# EAGLE board unoedge_v3_rutado_mcleod (EAGLE 7.2.0)
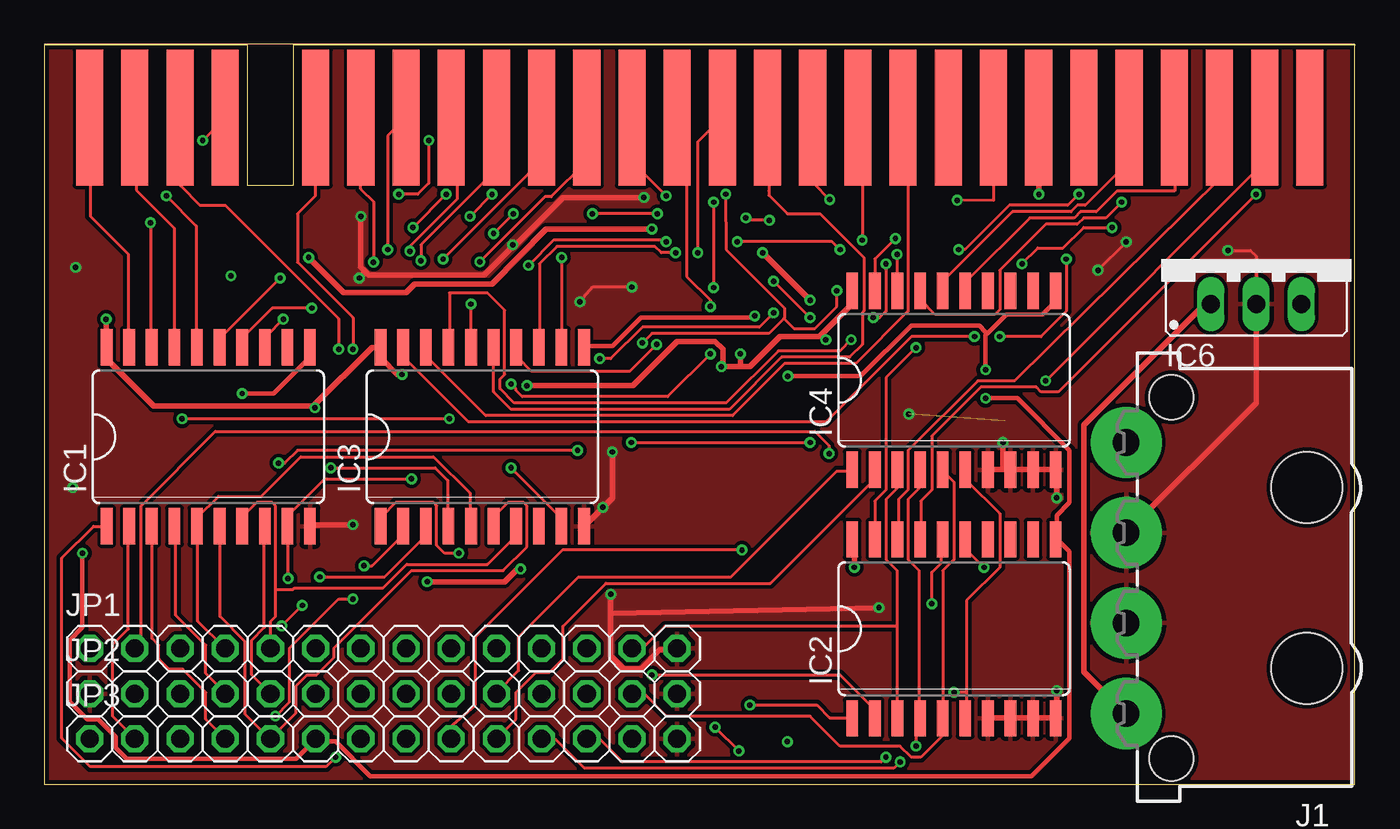
[diagram p0: board, top side]
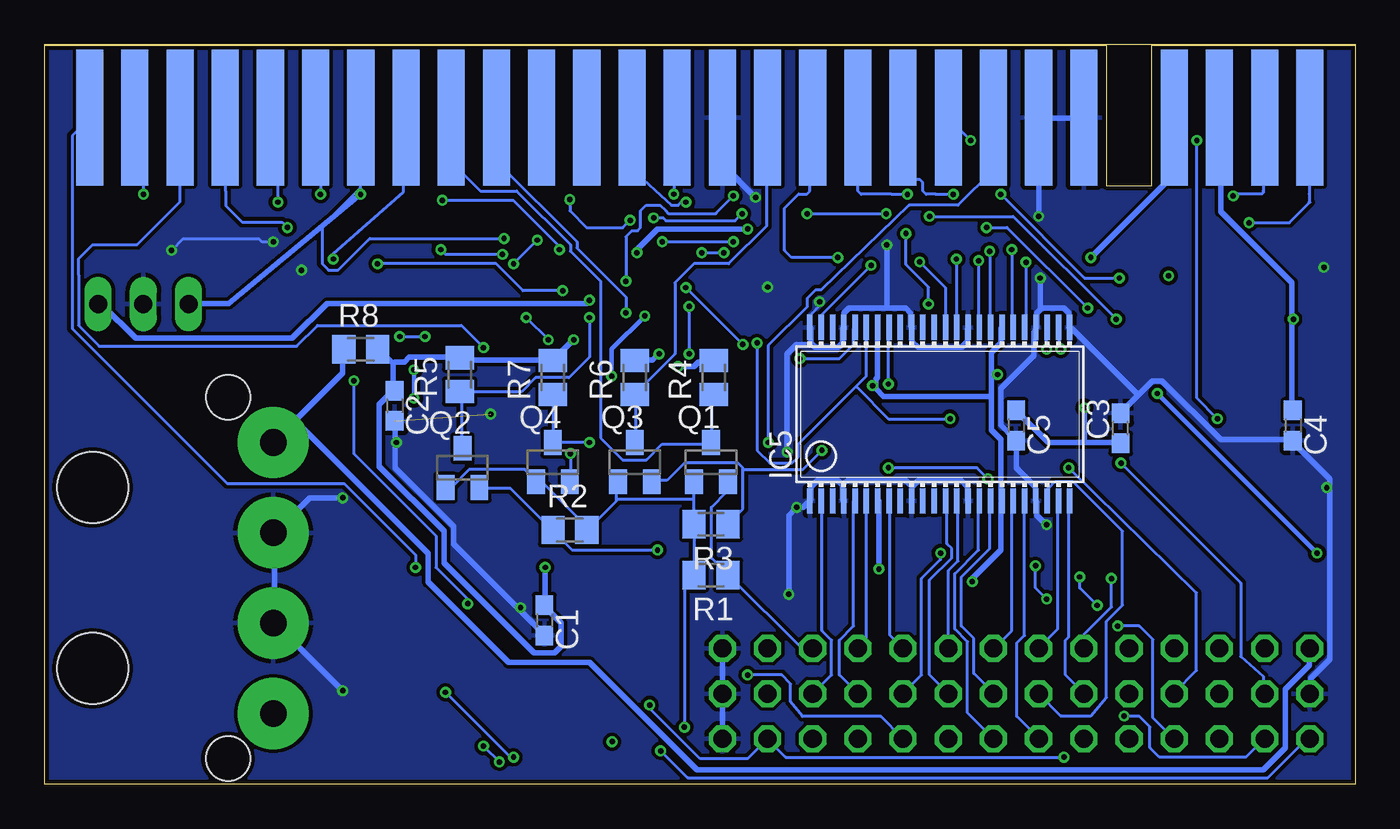
[diagram p1: board, bottom side, seen from below]

Size 73.66 x 41.58 mm. Coordinates in mm from the lower left corner, seen from the top.
Outline: 0,0 73.64,0 73.64,41.58 0,41.58 0,0
Copper layers (1*16): Top 0.035mm / dielectric 1.5mm / Bottom 0.035mm
Design rules "ITEADstudio_DRC": minimum track width 6mil, minimum drill 12mil, track to track 6mil, track to pad 6mil, pad to pad 6mil, via to via 6mil, smd to smd 0mil, copper to edge 10mil, drill to drill 10mil, minimum pad ring 10mil, minimum via ring 6mil, stop-mask expansion 2mil, vias tented up to drill 100mil, thermal gap 10mil
Net classes: 0 default: width 0.178 mm, clearance 0.178 mm; 1 power: width 0.305 mm, clearance 0.203 mm to class 0, clearance 0.203 mm; 2 clk: width 0.254 mm, clearance 0.178 mm to class 0, clearance 0.203 mm to class 1, clearance 0.178 mm

## Footprints (pad centres in the part's own frame; a part is rotated, then mirrored left to right if it is on the bottom)
C0603 = smd 1.1 x 1: 1 -0.85,0; 2 0.85,0
SO20W = smd 0.66 x 2.032: 1 -5.715,-5.029; 2 -4.445,-5.029; 3 -3.175,-5.029; 4 -1.905,-5.029; 5 -0.635,-5.029; 6 0.635,-5.029; 7 1.905,-5.029; 8 3.175,-5.029; 9 4.445,-5.029; 10 5.715,-5.029; 11 5.715,5.029; 12 4.445,5.029; 13 3.175,5.029; 14 1.905,5.029; 15 0.635,5.029; 16 -0.635,5.029; 17 -1.905,5.029; 18 -3.175,5.029; 19 -4.445,5.029; 20 -5.715,5.029
SSOP48DL = smd 0.305 x 1.422: 1 -6.985,-4.877; 2 -6.35,-4.877; 3 -5.715,-4.877; 4 -5.08,-4.877; 5 -4.445,-4.877; 6 -3.81,-4.877; 7 -3.175,-4.877; 8 -2.54,-4.877; 9 -1.905,-4.877; 10 -1.27,-4.877; 11 -0.635,-4.877; 12 0,-4.877; 13 0.635,-4.877; 14 1.27,-4.877; 15 1.905,-4.877; 16 2.54,-4.877; 17 3.175,-4.877; 18 3.81,-4.877; 19 4.445,-4.877; 20 5.08,-4.877; 21 5.715,-4.877; 22 6.35,-4.877; 23 6.985,-4.877; 24 7.62,-4.877; 25 7.62,4.877; 26 6.985,4.877; 27 6.35,4.877; 28 5.715,4.877; 29 5.08,4.877; 30 4.445,4.877; 31 3.81,4.877; 32 3.175,4.877; 33 2.54,4.877; 34 1.905,4.877; 35 1.27,4.877; 36 0.635,4.877; 37 0,4.877; 38 -0.635,4.877; 39 -1.27,4.877; 40 -1.905,4.877; 41 -2.54,4.877; 42 -3.175,4.877; 43 -3.81,4.877; 44 -4.445,4.877; 45 -5.08,4.877; 46 -5.715,4.877; 47 -6.35,4.877; 48 -6.985,4.877
78XXS = drill 1.016 long: GND 0,-2.54; IN -2.54,-2.54; OUT 2.54,-2.54
827001 = drill 1.5 pad 4: 1 -7.62,0; 2 -2.54,0; 3 2.54,0; 4 7.62,0 | hole 4: 5.08,-10.16; -5.08,-10.16 | hole 2.5: 10.16,-2.54; -10.16,-2.54
1X14 = drill 1.016 octagon: 1 -16.51,0; 2 -13.97,0; 3 -11.43,0; 4 -8.89,0; 5 -6.35,0; 6 -3.81,0; 7 -1.27,0; 8 1.27,0; 9 3.81,0; 10 6.35,0; 11 8.89,0; 12 11.43,0; 13 13.97,0; 14 16.51,0
SOT23 = smd 1 x 1.4: 1 -0.95,-1.1; 2 0.95,-1.1; 3 0,1.1
M0805 = smd 1.3 x 1.6: 1 -0.95,0; 2 0.95,0
CONECTOR_LADO_SPECTRUM = smd 7.62 x 1.524: P$1 2.54,2.54; P$2 2.54,0; P$3 2.54,-2.54; P$4 2.54,-5.08; P$5 2.54,-10.16; P$6 2.54,-12.7; P$7 2.54,-15.24; P$8 2.54,-17.78; P$9 2.54,-20.32; P$10 2.54,-22.86; P$11 2.54,-25.4; P$12 2.54,-27.94; P$13 2.54,-30.48; P$14 2.54,-33.02; P$15 2.54,-35.56; P$16 2.54,-38.1; P$17 2.54,-40.64; P$18 2.54,-43.18; P$19 2.54,-45.72; P$20 2.54,-48.26; P$21 2.54,-50.8; P$22 2.54,-53.34; P$23 2.54,-55.88; P$24 2.54,-58.42; P$25 2.54,-60.96; P$26 2.54,-63.5; P$27 2.54,-66.04 | smd 7.62 x 1.524 bottom: P$28 2.54,2.54; P$29 2.54,0; P$30 2.54,-2.54; P$31 2.54,-5.08; P$32 2.54,-10.16; P$33 2.54,-12.7; P$34 2.54,-15.24; P$35 2.54,-17.78; P$36 2.54,-20.32; P$37 2.54,-22.86; P$38 2.54,-25.4; P$39 2.54,-27.94; P$40 2.54,-30.48; P$41 2.54,-33.02; P$42 2.54,-35.56; P$43 2.54,-38.1; P$44 2.54,-40.64; P$45 2.54,-43.18; P$46 2.54,-45.72; P$47 2.54,-48.26; P$48 2.54,-50.8; P$49 2.54,-53.34; P$50 2.54,-55.88; P$51 2.54,-58.42; P$52 2.54,-60.96; P$53 2.54,-63.5; P$54 2.54,-66.04

## Placement (x,y rotation side)
C1  [C0603]  45.56,9.21 270 bottom
C2  [C0603]  53.98,21.27 270 bottom
C3  [C0603]  13.18,20 90 bottom
C4  [C0603]  3.49,20.16 270 bottom
C5  [C0603]  19.05,20.16 270 bottom
IC1  74HC574D  [SO20W]  9.21,19.53 0 top
IC2  74HC574D  [SO20W]  51.12,8.73 0 top
IC3  74HC574D  [SO20W]  24.61,19.53 0 top
IC4  74HC574D  [SO20W]  51.12,22.7 0 top
IC5  74AC16245  [SSOP48DL]  23.65,20.8 0 bottom
IC6  7809  [78XXS]  68.1,29.53 0 top
J1  [827001]  60.8,11.59 90 top
JP1  fila1  [1X14]  19.05,7.62 0 top
JP2  fila2  [1X14]  19.05,5.08 0 top
JP3  fila3  [1X14]  19.05,2.54 0 top
Q1  BSS123  [SOT23]  36.2,18.1 0 bottom
Q2  BSS123  [SOT23]  50.16,17.78 0 bottom
Q3  BSS123  [SOT23]  40.48,18.1 0 bottom
Q4  BSS123  [SOT23]  45.09,18.1 0 bottom
R1  [M0805]  36.2,11.75 180 bottom
R2  [M0805]  44.13,14.29 0 bottom
R3  [M0805]  36.2,14.61 180 bottom
R4  [M0805]  36.04,22.86 90 bottom
R5  [M0805]  50.32,23.02 90 bottom
R6  [M0805]  40.48,22.86 90 bottom
R7  [M0805]  45.09,22.86 90 bottom
R8  [M0805]  55.88,24.45 0 bottom
U$2  CONECTOR_EDGE_LADO_SPECTRUM  [CONECTOR_LADO_SPECTRUM]  5.08,34.92 90 top

## Library data of the parts
C1-C5 R1-R8 = rcl
IC1-IC4 = 74xx-eu
IC5 = 74ac-logic
IC6 = v-reg
J1 = con-amp
JP1-JP3 = pinhead
Q1-Q4 = transistor-small-signal
U$2 = zx_bus_connector_lado_spectrum

## Nets
+3.3V: JP3.1 Q1.1 Q2.1 Q3.1 Q4.1 R1.2 R2.2 R3.2
+9V [power]: IC6.OUT U$2.P$31
+12V [power]: IC6.IN J1.1 U$2.P$21
/BUSAK: IC2.19 U$2.P$52
/BUSRQ: IC5.44 U$2.P$45
/HALT: IC3.13 U$2.P$14
/INT: Q2.3 R5.1 U$2.P$12
/IORQ: IC3.16 U$2.P$16
/IORQULA: Q3.3 R6.1 U$2.P$39
/M1: IC4.16 U$2.P$23
/MREQ: IC3.15 U$2.P$15
/NMI: IC5.41 U$2.P$13
/RD: IC3.17 U$2.P$17
/RESET: Q1.3 R4.1 U$2.P$46
/RFSH: IC4.15 U$2.P$24
/WAIT: IC5.47 U$2.P$20
/WR: IC3.18 U$2.P$18
/Y: IC3.14 U$2.P$42
A0: IC1.15 U$2.P$35
A1: IC1.14 U$2.P$36
A2: IC1.13 U$2.P$37
A3: IC3.12 U$2.P$38
A4: IC4.17 U$2.P$50
A5: IC4.18 U$2.P$49
A6: IC4.19 U$2.P$48
A7: IC3.19 U$2.P$47
A8: IC2.18 U$2.P$25
A9: IC2.17 U$2.P$53
A10: IC2.16 U$2.P$26
A11: IC2.15 U$2.P$54
A12: IC1.16 U$2.P$29
A13: IC1.17 U$2.P$2
A14: IC1.18 U$2.P$28
A15: IC1.19 U$2.P$1
CKEXT: Q4.3 R7.1 U$2.P$34
D0: IC5.27 U$2.P$5
D1: IC5.29 U$2.P$6
D2: IC5.30 U$2.P$7
D3: IC5.35 U$2.P$10
D4: IC5.36 U$2.P$11
D5: IC5.33 U$2.P$9
D6: IC5.32 U$2.P$8
D7: IC5.26 U$2.P$3
EXT1: JP1.2 Q4.2
EXT2: JP2.2 Q3.2 R3.1
EXT3: IC1.2 IC3.2 JP3.2
EXT7: IC1.5 IC3.5 JP1.4
EXT8: IC1.4 IC3.4 JP2.4
EXT9: IC1.3 IC3.3 JP3.4
EXT10: IC1.7 IC3.7 JP1.5
EXT11: IC1.8 JP2.5
EXT12: IC1.6 IC3.6 JP3.5
EXT13: IC1.9 IC3.9 JP1.6
EXT14: IC5.24 JP2.6
EXT15 [clk]: IC1.11 IC2.11 IC3.11 IC4.11 JP3.6
EXT16: IC5.23 JP1.7
EXT17: IC5.22 JP2.7
EXT18: IC5.20 JP3.7
EXT19: IC5.19 JP1.8
EXT20: IC5.17 JP2.8
EXT21: IC5.16 JP3.8
EXT22: IC5.14 JP1.9
EXT23: IC5.13 JP2.9
EXT24: JP3.9 Q2.2 R2.1
EXT25: IC5.8 JP1.10
EXT26: IC3.1 IC4.1 JP2.10
EXT27: IC2.2 IC4.2 JP3.10
EXT28: IC5.6 JP1.11
EXT29: IC5.5 JP2.11
EXT30: IC2.4 IC4.4 JP3.11
EXT31: JP1.12 Q1.2 R1.1
EXT32: IC5.2 JP2.12
EXT33: IC2.6 IC4.6 JP3.12
EXT34: IC2.3 IC4.3 JP1.13
EXT35: IC2.5 IC4.5 JP2.13
EXT36: IC1.1 IC2.1 JP3.13
GND [power]: C1.2 C2.2 C3.2 C4.2 C5.2 IC1.10 IC2.7 IC2.8 IC2.9 IC2.10 IC3.10 IC4.7 IC4.8 IC4.9 IC4.10 IC5.1 IC5.4 IC5.10 IC5.15 IC5.21 IC5.25 IC5.28 IC5.34 IC5.39 IC5.45 IC5.48 IC6.GND J1.2 J1.3 JP1.14 JP2.1 JP2.14 JP3.14 U$2.P$32 U$2.P$33 U$2.P$40
ROMCS: IC5.43 U$2.P$4 U$2.P$41 U$2.P$51
VCC [power]: C1.1 C2.1 C3.1 C4.1 C5.1 IC1.20 IC2.20 IC3.20 IC4.20 IC5.7 IC5.18 IC5.31 IC5.42 R4.2 R5.2 R6.2 R7.2 R8.2 U$2.P$30
VCCIN [power]: J1.4 JP1.1 R8.1

## Tracks (layer width: path | path; a pad name or v marks a point on that pad's centre or on a via)
+3.3V  (via drill 0.3)
  Top 0.178: v37.69,3.2 v39.03,1.87
  Bottom 0.178: 41.52,16 41.52,15.91 43.12,14.31 R2.2 43.12,14.4 45.7,16.98 45.96,16.98 Q4.1 46.05,17.07 46.67,17.69 49.78,17.69 50.76,16.71 51.03,16.71 Q2.1 | 41.52,16 41.52,16.98 Q3.1 | 37.16,16 37.16,14.67 R3.2 37.16,14.58 37.16,11.82 R1.2 37.16,11.73 37.69,11.2 v37.69,3.2 | 37.16,16 37.16,16.98 Q1.1 | v39.03,1.87 37.52,0.36 4.89,0.36 2.76,2.49 2.58,2.49 JP3.1 | 37.16,16 41.52,16
+9V  (via drill 0.3)
  Top 0.305: v40.36,29.87 v43.03,27.2 | v34.14,31.2 28.18,31.2 25.15,28.1 25.02,28.1 24.29,28.1 20.8,28.1 20.32,27.62 16.83,27.62 16.71,27.74 v14.85,29.6
  Bottom 0.305: v43.03,27.2 43.2,27.03 57.78,27.03 59.74,25.07 68.54,25.07 70.41,26.94 70.59,26.94 IC6.OUT | v40.36,29.87 40.36,30.05 39.2,31.2 v34.14,31.2 | v14.85,29.6 10.22,34.23 10.22,37.43 U$2.P$31
+12V  (via drill 0.3)
  Top 0.305: IC6.IN 65.52,26.94 65.16,26.94 58.41,20.18 58.41,6.31 60.72,4 J1.1 | v55.89,33.16 55.92,34.4 55.92,37.43 U$2.P$21
  Bottom 0.305: v55.89,33.16 63.3,27.03 65.52,27.03 IC6.IN
/BUSAK  (via drill 0.3)
  Top 0.178: v48.98,24.54 47.3,22.85 47.3,16.54 46.67,15.91 46.67,13.78 IC2.19
  Bottom 0.178: v48.98,24.54 50.23,25.78 58.32,25.78 59.47,24.62 70.59,24.62 71.74,25.78 71.74,28.63 71.74,29.54 70.96,30.32 68.46,30.32 66.05,32.73 66.05,37.43 U$2.P$52
/BUSRQ  (via drill 0.3)
  Top 0.178: v31.2,23.91 31.83,23.91 33.6,25.69 40.18,25.69 v40.98,26.49
  Bottom 0.178: v31.2,23.91 28.98,23.91 28.18,24.71 28.18,25.6 IC5.44 | v40.98,26.49 40.98,27.38 43.74,30.14 43.74,30.49 48.18,34.94 48.18,37.43 U$2.P$45
/HALT  (via drill 0.3)
  Top 0.178: v35.47,29.87 34.67,29.87 34.31,30.23 28.8,30.23 27.83,29.25 27.83,24.62 IC3.13 | v36.72,29.87 36.72,36.09 38.05,37.43 U$2.P$14
  Bottom 0.178: v36.72,29.87 v35.47,29.87
/INT  (via drill 0.3)
  Top 0.178: v40.98,28.27 v43.03,26.23 | v34.94,33.07 33.07,34.94 33.07,37.43 U$2.P$12
  Bottom 0.178: Q2.3 50.23,18.94 50.23,21.96 50.32,22.05 R5.1 50.23,22.05 46.85,22.05 46.05,22.85 44.18,22.85 43.03,24 v43.03,26.23 | v40.98,28.27 40.98,30.77 40.64,31.11 40.32,31.11 40.16,31.27 40.16,32.23 39.85,32.54 39.05,32.54 38.73,32.23 38.58,32.07 35.94,32.07 35.92,32.09 v34.94,33.07
/IORQ  (via drill 0.3 pad 0.61)
  Top 0.178: IC3.16 v23.97,26.99 | U$2.P$16 43.18,33.81 v44.13,32.86 | v40.74,31.7 39.6,31.7 v39.42,31.83 | v34.45,32.07 v30.8,32.07 | v25.24,30.96 v26.35,32.07
  Bottom 0.178: v23.97,26.99 23.97,27.94 24.29,28.26 25.24,29.21 v25.24,30.96 | v44.13,32.86 44.13,32.23 43.18,31.27 41.17,31.27 v40.74,31.7 | v39.42,31.83 38.89,31.83 38.73,31.67 34.84,31.67 v34.45,32.07 | v30.8,32.07 v26.35,32.07
/IORQULA
  Bottom 0.178: Q3.3 40.45,19.2 40.45,21.87 R6.1 40.45,21.96 38.23,24.18 38.23,28.18 37.16,29.25 35.2,29.25 33.07,31.38 33.07,37.43 U$2.P$39
/M1
  Top 0.178: IC4.16 50.49,27.74 50.49,28.27 54.41,32.18 57.7,32.18 58.05,32.54 58.5,32.54 60.9,34.94 60.9,37.43 U$2.P$23
/MREQ
  Top 0.178: IC3.15 25.25,24.54 25.25,22.05 26.23,21.07 38.49,21.07 41.43,24 45.25,24 45.96,24.71 45.96,26.49 46.05,26.58 46.05,29.6 43.59,32.07 41.75,32.07 40.72,33.1 40.72,33.35 40.72,37.43 U$2.P$15
/NMI  (via drill 0.3)
  Top 0.178: v26.23,22.49 26.49,22.23 26.49,22.14 26.85,21.78 35.03,21.78 v37.43,24.18 | v37.43,26.85 37.43,27.2 36.09,28.54 36.09,36.89 35.56,37.43 U$2.P$13
  Bottom 0.178: v26.23,22.49 26.23,25.6 IC5.41 | v37.43,26.85 v37.43,24.18
/RD  (via drill 0.3)
  Top 0.178: v45.34,24.98 44.72,24.36 41.25,24.36 38.32,21.43 26.4,21.43 25.6,22.23 25.6,22.76 25.87,23.02 25.87,26.64 24.9,27.62 22.77,27.62 22.76,25.07 22.76,24.62 IC3.17 | v46.58,26.23 46.94,26.23 47.3,26.58 v47.3,29.25 | v45.96,30.58 45.96,37.25 45.78,37.43 U$2.P$17
  Bottom 0.178: v46.58,26.23 v45.34,24.98 | v45.96,30.58 v47.3,29.25
/RESET
  Bottom 0.178: R4.1 36.09,21.87 36.18,21.78 36.18,19.2 Q1.3 36.27,19.11 38.94,19.11 39.83,18.22 41.16,18.22 42.41,19.47 42.41,28.27 44.09,29.96 44.09,30.32 47.12,33.34 49.16,33.34 50.76,34.94 50.76,37.43 U$2.P$46
/RFSH
  Top 0.178: IC4.15 51.83,27.74 51.83,28.27 55.38,31.83 57.87,31.83 58.23,32.18 59.12,32.18 60.27,33.34 63.53,33.34 63.48,35.03 63.48,37.43 U$2.P$24
/WAIT  (via drill 0.3)
  Top 0.178: v27.2,29.16 28.63,30.58 34.85,30.58 v34.94,30.49 | v38.94,30.49 44.27,30.49 v44.72,30.05 | v51.3,32.82 53.34,32.8 53.34,37.43 U$2.P$20
  Bottom 0.178: v27.2,29.16 29.96,26.4 29.96,25.69 IC5.47 | v38.94,30.49 v34.94,30.49 | v44.72,30.05 44.72,30.23 47.31,32.82 v51.3,32.82
/WR
  Top 0.178: IC3.18 21.51,24.54 21.51,24 24.8,20.71 38.67,20.71 41.6,23.65 45.61,23.65 48.54,26.58 48.54,37.16 48.27,37.43 U$2.P$18
/Y  (via drill 0.3)
  Top 0.178: v34.4,24.71 32.89,23.2 27.38,23.2 26.58,24 26.58,24.54 IC3.14 | v37.6,32.72 v37.6,27.91
  Bottom 0.178: v37.6,27.91 v34.4,24.71 | v37.6,32.72 37.87,32.72 38.05,32.54 38.42,32.54 40.63,34.58 40.63,37.43 U$2.P$42
A0  (via drill 0.3)
  Top 0.178: v13.25,28.45 9.87,25.07 9.87,24.62 IC1.15 | v19.91,33.16 20.98,33.16 21.6,33.78 v21.6,36.18
  Bottom 0.178: v13.25,28.45 15.2,28.45 v19.91,33.16 | v21.6,36.18 22.85,37.43 U$2.P$35
A1  (via drill 0.3)
  Top 0.178: v15.02,26.76 12.8,26.76 11.11,25.07 11.11,24.62 IC1.14 | v22.58,33.16 v20.71,31.29
  Bottom 0.178: v15.02,26.76 19.56,31.29 v20.71,31.29 | v22.58,33.16 23.56,33.16 24.11,33.16 24.29,33.34 24.29,33.81 24.45,33.97 25.08,33.97 25.4,34.29 25.4,34.87 25.34,34.94 25.34,37.43 U$2.P$36
A2  (via drill 0.3)
  Top 0.178: v13.42,26.14 12.45,25.16 12.45,24.62 IC1.13 | v25.16,33.16 v23.91,31.91
  Bottom 0.178: v13.42,26.14 19.2,31.91 v23.91,31.91 | v25.16,33.16 26.05,33.16 27.76,33.16 27.94,33.34 27.94,35 27.91,35.03 27.91,37.43 U$2.P$37
A3  (via drill 0.3)
  Top 0.178: v29.07,29.6 29.07,24.62 IC3.12
  Bottom 0.178: 30.4,37.43 U$2.P$38 30.64,37.31 30.64,33.34 30.8,33.18 31.27,33.18 32.07,32.38 32.07,30 31.67,29.6 v29.07,29.6
A4  (via drill 0.3)
  Top 0.178: v60.54,32.72 59.65,31.83 58.41,31.83 58.05,31.47 56.27,31.47 53.7,28.89 53.7,26.67 53.43,26.4 50.05,26.4 49.25,27.2 49.25,27.65 IC4.17
  Bottom 0.178: v60.54,32.72 60.54,37.07 60.9,37.43 U$2.P$50
A5  (via drill 0.3)
  Top 0.178: v47.92,29.78 47.92,27.74 IC4.18 | v51.38,30.05 51.74,30.05 54.23,32.54 57.52,32.54 v58.14,33.16
  Bottom 0.178: v47.92,29.78 51.12,29.78 v51.38,30.05 | v58.14,33.16 58.14,37.16 58.41,37.43 U$2.P$49
A6  (via drill 0.3)
  Top 0.178: v47.83,30.67 46.67,29.52 IC4.19
  Bottom 0.178: v47.83,30.67 55.38,30.67 57.16,28.89 57.7,28.89 58.05,29.25 58.05,31.38 55.92,33.52 55.92,37.43 U$2.P$48
A7  (via drill 0.3)
  Top 0.178: v52.27,25.16 48.72,25.16 43.92,20.36 23.82,20.36 20.18,24 20.18,24.54 IC3.19 | v53.7,25.16 56.01,25.16 57.43,26.58 v57.43,29.52
  Bottom 0.178: v53.7,25.16 v52.27,25.16 | v57.43,29.52 57.43,29.83 53.5,33.28 53.34,37.43 U$2.P$47
A8
  Top 0.178: IC2.18 48.01,13.78 48.01,16 48.54,16.54 48.54,18.76 52.45,22.67 54.53,22.67 66.12,34.11 65.96,37.43 U$2.P$25
A9  (via drill 0.3)
  Top 0.178: v68.1,33.16 56.98,22.05 56.01,22.05 55.74,22.31 52.63,22.31 49.87,19.56 49.87,16.54 49.25,15.91 49.25,13.78 IC2.17
  Bottom 0.178: v68.1,33.16 68.1,36.98 68.54,37.43 U$2.P$53
A10  (via drill 0.3)
  Top 0.178: v49.87,10.13 49.87,11.91 50.41,12.45 50.41,13.69 IC2.16 | v56.27,22.67 68.54,34.94 68.54,37.43 U$2.P$26
  Bottom 0.178: v49.87,10.13 49.87,10.4 51.65,12.18 51.65,13.96 56.27,18.58 v56.27,22.67
A11  (via drill 0.3)
  Top 0.178: v52.81,12.18 51.83,13.16 51.83,13.69 IC2.15
  Bottom 0.178: v52.81,12.18 52.81,12.89 56.81,16.89 63.39,16.89 72.1,25.6 72.1,36.45 71.12,37.43 U$2.P$54
A12  (via drill 0.3)
  Top 0.178: v6.84,33.07 8.53,31.38 8.53,24.62 IC1.16
  Bottom 0.178: U$2.P$29 5.16,37.43 5.16,33.35 5.16,33.26 5.24,33.18 6.74,33.18 v6.84,33.07
A13
  Top 0.178: IC1.17 7.29,24.62 7.29,31.26 5.16,33.4 5.16,37.43 U$2.P$2
A14  (via drill 0.3)
  Top 0.178: v5.96,31.56 5.96,24.62 IC1.18
  Bottom 0.178: U$2.P$28 2.58,37.43 2.58,33.19 2.58,32.74 2.54,32.7 3.68,31.56 v5.96,31.56
A15
  Top 0.178: IC1.19 4.71,24.62 4.71,29.79 2.58,31.92 2.58,37.43 U$2.P$1
CKEXT  (via drill 0.3)
  Top 0.178: v32.98,19.2 v43.03,19.2
  Bottom 0.178: R7.1 45.07,21.87 45.07,19.2 Q4.3 44.98,19.2 v43.03,19.2 | v32.98,19.2 32.98,24.62 32.98,24.64 30.8,26.83 30.8,27.3 30.32,27.78 30,27.78 25.07,32.54 22.31,32.54 20.36,34.49 20.36,37.43 U$2.P$34
D0  (via drill 0.3)
  Top 0.178: v17.34,24.45 17.34,26.23 14.22,29.34 14.22,32.07 15.2,33.05 15.2,37.43 U$2.P$5
  Bottom 0.178: v17.34,24.45 17.34,25.6 IC5.27
D1  (via drill 0.3)
  Top 0.178: v18.49,29.34 18.49,32.75 17.78,33.46 U$2.P$6
  Bottom 0.178: v18.49,29.34 18.49,25.69 IC5.29
D2  (via drill 0.3)
  Top 0.178: v19.29,30.05 19.29,36.45 20.27,37.43 U$2.P$7
  Bottom 0.178: v19.29,30.05 19.29,25.69 IC5.30
D3  (via drill 0.3)
  Top 0.178: v22.4,29.52 27.91,35.03 27.91,37.43 U$2.P$10
  Bottom 0.178: v22.4,29.52 22.4,25.69 IC5.35
D4  (via drill 0.3)
  Top 0.178: v24.47,29.36 28.13,33.02 28.49,33.02 30.4,34.94 30.4,37.43 U$2.P$11
  Bottom 0.178: v24.47,29.36 23.02,27.91 23.02,25.69 IC5.36
D5  (via drill 0.3)
  Top 0.178: v21.16,29.43 21.16,30.32 25.34,34.49 25.34,37.43 U$2.P$9
  Bottom 0.178: v21.16,29.43 21.16,25.69 IC5.33
D6  (via drill 0.3)
  Top 0.178: v20.54,29.96 20.54,30.23 23.2,32.89 23.2,37.16 22.94,37.43 U$2.P$8
  Bottom 0.178: v20.54,29.96 20.54,25.69 IC5.32
D7  (via drill 0.3)
  Top 0.178: v16.54,24.45 16.54,26.14 16.54,26.17 16.51,26.19 10.16,32.54 8.73,32.54 7.64,33.63 7.64,35.03 7.64,37.43 U$2.P$3
  Bottom 0.178: v16.54,24.45 16.62,24.54 16.62,25.6 IC5.26
EXT1  (via drill 0.3)
  Top 0.178: v44.09,18.58 44.09,19.02 43.29,19.82 9.6,19.82 5.42,15.65 5.42,7.91 5.16,7.64 JP1.2
  Bottom 0.178: v44.09,18.58 44.09,17.07 Q4.2
EXT2  (via drill 0.3)
  Top 0.178: v13.16,18.05 13.51,18.05 14.22,18.76 v29.96,18.76
  Bottom 0.178: 34.4,17.69 34.4,15.47 35.2,14.67 R3.1 | 34.4,17.69 34.4,17.78 34.67,18.05 37.69,18.05 38.67,17.07 39.47,17.07 Q3.2 | v13.16,18.05 6.42,11.31 6.42,7.17 5.16,6.06 5.16,5.16 JP2.2 | v29.96,18.76 31.03,17.69 34.4,17.69
EXT3  (via drill 0.3)
  Top 0.178: IC1.2 4.71,14.49 4.71,8.71 3.84,7.84 3.84,3.8 5.07,2.58 JP3.2 | v17.96,12.27 18.4,12.27 20.09,13.96 20.09,14.49 IC3.2 | v17.34,10.4 16.54,10.4 13.78,7.64 13.78,4.62 v12.98,3.82
  Bottom 0.178: v17.96,12.27 17.96,11.02 v17.34,10.4 | v12.98,3.82 12.13,3.82 11.52,3.21 11.52,2.04 10.99,1.51 6.13,1.51 5.16,2.49 JP3.2
EXT7
  Top 0.178: JP1.4 10.13,7.64 8.62,9.16 8.62,14.49 IC1.5 8.62,14.58 8.62,15.02 9.78,16.18 12.18,16.18 14.4,18.4 21.87,18.4 23.91,16.36 23.91,14.58 IC3.5
EXT8  (via drill 0.3)
  Top 0.178: IC1.4 7.38,14.49 7.38,9.49 9.07,7.8 9.07,6.22 10.13,5.16 JP2.4 | v16.09,17.78 21.96,17.78 22.67,17.07 22.67,14.58 IC3.4
  Bottom 0.178: v16.09,17.78 8.91,10.76 8.91,6.38 10.13,5.16 JP2.4
EXT9  (via drill 0.3)
  Top 0.178: IC1.3 6.04,14.49 6.04,8.18 6.42,7.8 6.42,7.04 7.01,6.45 7.77,6.45 9.07,5.16 9.07,3.65 10.13,2.58 JP3.4 | v15.47,11.65 19.11,11.65 21.43,13.96 IC3.3 | v13.34,8.89 v14.49,10.05
  Bottom 0.178: v15.47,11.65 15.47,11.02 v14.49,10.05 | v13.34,8.89 12.13,8.89 11.36,8.12 11.36,3.71 10.22,2.58 JP3.4
EXT10
  Top 0.178: 12.98,10.94 12.98,9.42 12.71,9.16 12.71,7.64 JP1.5 | 12.98,10.94 12.98,15.65 12.8,15.82 11.91,15.82 11.11,15.02 11.11,14.58 IC1.7 | 12.98,10.94 13.96,10.94 14.05,11.02 19.02,11.02 20.36,12.36 24.89,12.36 26.49,13.96 26.49,14.49 IC3.7
EXT11
  Top 0.178: IC1.8 12.36,14.49 12.36,8.8 11.65,8.09 11.65,6.13 12.62,5.16 JP2.5
EXT12
  Top 0.178: IC1.6 9.87,14.49 9.87,9.42 11.29,8 11.29,3.91 12.62,2.58 JP3.5 12.71,2.58 14.13,4 14.13,5.51 14.76,6.13 15.29,6.13 16.27,7.11 16.27,7.64 20.62,12 25.78,12 27.11,13.34 27.11,15.65 26.94,15.82 26.05,15.82 25.25,15.02 25.25,14.58 IC3.6
EXT13  (via drill 0.3)
  Top 0.178: v13.69,11.56 13.69,14.49 IC1.9 13.69,14.58 13.69,15.11 15.73,17.16 v20.62,17.16 | v26.23,17.78 28.98,15.02 28.98,14.58 IC3.9
  Bottom 0.178: v13.69,11.56 13.69,9.96 15.2,8.45 15.2,7.64 JP1.6 | v26.23,17.78 21.25,17.78 v20.62,17.16
EXT14
  Bottom 0.178: IC5.24 16.09,15.91 16.09,8.27 16.27,8.09 16.27,6.13 15.29,5.16 JP2.6
EXT15  (via drill 0.3)
  Top 0.254: v11.11,21.96 12.89,21.96 14.85,23.91 14.85,24.54 IC1.11 | v2.13,12.98 2.13,8.8 1.42,8.09 1.42,4.62 2.4,3.65 3.02,3.65 4,2.67 4,2.04 4.62,1.42 14.13,1.42 15.2,2.49 JP3.6 15.29,2.4 16.36,2.4 18.31,0.45 55.47,0.45 57.61,2.58 57.61,13.07 56.98,13.69 IC2.11 56.9,13.78 56.9,15.11 57.61,15.82 57.61,18.76 54.67,21.69 v52.9,21.69 | v52.9,23.29 52.9,25.25 52.98,25.34 | 52.98,25.34 54.05,26.4 56.1,26.4 56.81,27.11 56.81,27.65 IC4.11 | v39.92,26.31 39.83,26.23 33.52,26.23 31.91,24.62 30.4,24.62 IC3.11 | v41.78,22.94 45.87,22.94 48.72,25.78 52.54,25.78 52.9,25.43 52.98,25.34
  Bottom 0.254: v2.13,12.98 v11.11,21.96 | v52.9,23.29 v52.9,21.69 | v39.92,26.31 41.78,24.45 v41.78,22.94
EXT16
  Bottom 0.178: IC5.23 16.71,15.91 16.71,8.71 17.78,7.64 JP1.7
EXT17
  Bottom 0.178: IC5.22 17.25,16 17.25,16.62 16.89,16.98 15.82,16.98 13.07,14.22 13.07,10.05 13.98,9.14 13.98,4.87 14.85,3.84 16.55,3.84 17.78,5.07 JP2.7
EXT18
  Bottom 0.178: IC5.20 18.58,8.36 19.01,7.93 19.01,3.8 17.78,2.58 JP3.7
EXT19
  Bottom 0.178: IC5.19 19.29,15.91 19.29,8.62 20.27,7.64 JP1.8
EXT20
  Bottom 0.178: IC5.17 20.54,15.91 20.54,13.25 22.14,11.65 22.14,8.89 21.43,8.18 21.43,6.22 20.36,5.16 JP2.8
EXT21
  Bottom 0.178: IC5.16 21.16,15.91 21.16,13.16 22.49,11.82 22.49,8.71 21.78,8 21.78,4 20.36,2.58 JP3.8
EXT22
  Bottom 0.178: IC5.14 22.31,15.91 22.31,12.54 22.85,12 22.85,7.64 JP1.9
EXT23
  Bottom 0.178: IC5.13 22.94,15.91 22.94,13.51 22.67,13.25 22.67,12.71 23.91,11.47 23.91,6.13 22.94,5.16 JP2.9
EXT24  (via drill 0.3)
  Top 0.178: v39.2,13.16 29.11,13.16 24.2,8.25 24.2,4.43 22.94,3.33 22.94,2.58 JP3.9
  Bottom 0.178: Q2.2 49.16,16.62 47.47,16.62 45.16,14.31 R2.1 45.07,14.22 44.01,13.16 v39.2,13.16
EXT25
  Bottom 0.178: IC5.8 26.14,15.91 26.14,8.36 25.43,7.64 JP1.10
EXT26  (via drill 0.3)
  Top 0.178: v23.29,12.98 22.49,12.98 22.05,13.42 22.05,15.65 21.87,15.82 19.74,15.82 18.94,15.02 18.94,14.58 IC3.1 | IC4.1 45.34,17.6 44.54,17.6 38.58,11.65 30.02,11.65 26.65,8.28 26.65,6.38 25.43,5.16 JP2.10
  Bottom 0.178: v23.29,12.98 23.29,12.62 24.36,11.56 24.36,6.13 25.34,5.16 JP2.10
EXT27  (via drill 0.3)
  Top 0.178: v34.14,6.13 44.72,6.13 46.67,4.18 46.67,3.73 IC2.2 | IC4.2 46.67,17.6 46.67,17.16 40.8,11.29 31.56,11.29 29.14,8.87 29.14,7.04 28.39,6.29 27.63,6.29 26.49,5.16 26.49,3.65 25.43,2.58 JP3.10
  Bottom 0.178: v34.14,6.13 32.22,6.13 31.72,5.63 31.72,4.62 31.06,3.8 26.65,3.8 25.43,2.58 JP3.10
EXT28
  Bottom 0.178: IC5.6 27.47,8.09 27.91,7.64 JP1.11
EXT29
  Bottom 0.178: IC5.5 28.18,15.91 28.18,8.89 28.98,8.09 28.98,6.13 28,5.16 JP2.11
EXT30  (via drill 0.3)
  Top 0.178: IC4.4 49.16,17.6 49.16,16.62 48.54,16 48.54,12.62 49.16,12 49.16,3.73 IC2.4 49.16,3.65 48.98,3.47 v48.98,2.13 | v48.09,1.25 47.74,0.89 30.35,0.89 28.75,2.49 28,2.49 JP3.11
  Bottom 0.178: v48.98,2.13 v48.09,1.25
EXT31
  Bottom 0.178: Q1.2 35.29,16.98 35.29,16.45 36.18,15.56 36.18,12.71 35.29,11.82 R1.1 35.2,11.73 31.11,7.64 30.49,7.64 JP1.12
EXT32
  Bottom 0.178: IC5.2 29.96,15.91 29.96,8.62 29.43,8.09 29.43,6.13 30.4,5.16 JP2.12
EXT33  (via drill 0.3)
  Top 0.178: 51.83,5.16 51.83,10.31 53.7,12.18 53.7,15.2 51.83,17.07 51.83,17.6 IC4.6 | 51.83,5.16 51.83,3.73 IC2.6 | v47.3,1.51 47.03,1.25 32.49,1.25 31.24,2.49 30.49,2.49 JP3.12 | 51.83,5.16 v51.12,5.16
  Bottom 0.178: v47.3,1.51 47.47,1.51 v51.12,5.16
EXT34
  Top 0.178: 47.92,8.87 47.92,12 47.3,12.62 47.3,16 47.92,16.62 47.92,17.6 IC4.3 | 47.92,8.87 47.92,3.73 IC2.3 | 47.92,8.87 34.87,8.87 33.64,7.64 33.07,7.64 JP1.13
EXT35
  Top 0.178: IC4.5 50.49,17.6 51.12,16.98 51.12,12.62 50.49,12 50.49,3.73 IC2.5 50.41,3.65 50.41,2.67 49.25,1.51 48.72,1.51 48.09,2.13 44.72,2.13 43.03,3.82 34.98,3.82 33.73,5.07 33.07,5.07 JP2.13
EXT36  (via drill 0.3)
  Top 0.178: v39.65,4.45 43.41,4.45 44.13,3.73 45.34,3.73 IC2.1 | v16.36,1.51 15.82,0.98 2.58,0.98 0.98,2.58 0.98,12.71 2.76,14.49 3.47,14.49 IC1.1
  Bottom 0.178: v39.65,4.45 39.65,4.27 36.8,1.42 34.14,1.42 33.07,2.49 JP3.13 32.98,2.49 32,1.51 v16.36,1.51
GND  (via drill 0.3, 0.3 pad 0.61)  (1 unrouted)
  Top 0.178: v59.21,28.89 v60.8,30.48 | v66.52,30 67.79,30 68.1,29.69 IC6.GND | v33.02,27.94 30.8,27.94 v30.1,27.11
  Top 0.305: IC2.7 53.07,3.73 54.23,3.73 IC2.8 54.41,3.73 55.56,3.73 IC2.9 55.65,3.73 56.81,3.73 IC2.10 56.9,3.82 v56.9,5.25 | 53.87,17.69 54.23,17.69 IC4.8 54.41,17.69 55.56,17.69 IC4.9 55.65,17.69 56.81,17.69 IC4.10 56.9,17.6 v56.9,16.09 | 53.87,17.69 53.07,17.69 IC4.7 | v53.87,19.2 53.87,17.78 53.87,17.69 | IC6.GND 68.1,26.94 68.1,21.43 J1.3 | v17.34,14.58 14.94,14.58 IC1.10 | IC3.10 30.4,14.58 v31.38,15.56 31.47,15.65 31.91,16.09 v31.91,18.67 | v31.83,10.67 31.83,9.6 | 31.83,9.6 31.83,7.2 32.54,6.49 33.52,6.49 34.58,7.56 35.56,7.56 JP1.14 | v33.69,32.98 29.16,32.98 26.49,30.32 v26.31,30.32 26.31,30.23 24.71,28.63 18.22,28.63 18.05,28.8 | v17.78,31.91 17.78,29.07 18.05,28.8 | v17.69,28.45 17.96,28.71 18.05,28.8 | v46.9,9.92 31.91,9.6 31.83,9.6
  Bottom 0.178: v60.8,30.48 61.44,30.48 61.59,30.64 65.88,30.64 v66.52,30 | v30.1,27.11 30,26.99 30.64,26.35 IC5.48
  Bottom 0.305: v56.9,5.25 60.72,9.07 J1.2 60.72,9.16 60.72,14.05 J1.3 60.72,14.13 58.76,16.09 v56.9,16.09 | 46.99,9.83 50.67,13.51 50.67,14.49 53.96,17.78 53.96,19.2 | 46.99,9.83 45.61,8.45 C1.2 | 53.96,19.2 53.96,20.36 C2.2 | v53.87,19.2 53.96,19.2 | v17.34,14.58 17.87,15.11 17.87,15.82 IC5.21 17.96,16 17.96,16.71 19.02,17.78 19.02,19.29 C5.2 19.11,19.38 19.91,20.18 19.91,22.23 18.05,24.09 18.05,25.43 17.96,25.51 IC5.28 17.87,25.69 17.87,26.49 17.6,26.76 | 17.6,26.76 16.36,26.76 16.09,26.49 16.09,25.69 IC5.25 15.91,25.6 12.27,21.96 12.18,21.87 | 12.18,21.87 13.16,20.89 C3.2 | 12.18,21.87 11.38,22.67 10.85,22.67 7.56,19.38 3.56,19.38 C4.2 3.47,19.2 1.42,17.16 1.42,7.02 2.49,5.96 2.49,5.16 JP2.1 | U$2.P$32 15.29,37.43 17.78,37.43 U$2.P$33 17.78,37.34 v17.78,31.91 | JP3.14 35.56,2.58 35.56,5.07 JP2.14 35.56,5.16 35.56,7.56 JP1.14 | 30.58,24.8 30.32,24.54 29.07,24.54 28.8,24.8 28.8,25.6 IC5.45 28.71,25.78 28.71,26.49 28.45,26.76 26.31,26.76 | 30.58,24.8 30.58,25.6 IC5.48 | IC5.34 21.78,25.6 21.78,24.89 22.14,24.54 24.54,24.54 24.89,24.89 24.89,25.6 IC5.39 24.98,25.78 24.98,26.49 25.25,26.76 26.31,26.76 | 24.89,16.71 24.54,17.07 22.14,17.07 21.78,16.71 21.78,16 IC5.15 | 24.89,16.71 24.89,16 IC5.10 | 28.8,16.8 28.8,16 IC5.4 | 28.8,16.8 29.07,17.07 30.23,17.07 30.58,16.71 30.58,16 IC5.1 30.76,15.82 31.03,15.56 v31.38,15.56 31.47,15.47 31.83,15.11 v31.83,10.67 | 24.89,16.71 24.98,16.8 25.25,17.07 28.54,17.07 28.71,16.89 28.8,16.8 | v31.91,18.67 31.91,24.18 31.38,24.71 30.67,24.71 30.58,24.8 | v33.69,32.98 35.56,34.85 35.56,37.43 U$2.P$40 | v26.31,30.32 26.31,26.85 26.31,26.76
  Bottom 0.305: v17.69,28.45 17.69,26.85 17.6,26.76 | v46.9,9.92 46.99,9.83
  other vias: 1.75,29.05 1.59,16.67 48.58,20.8
  pour Top: 0,41.59 73.66,41.59 73.66,0 0,0
  pour Bottom: 0,41.43 0,0 73.66,0 73.66,41.59 0,41.59
N$4  (via drill 0.3 pad 0.61)
  other vias: 10.48,28.57
N$7  (via drill 0.3 pad 0.61)
  other vias: 41.75,2.38
ROMCS  (via drill 0.3)
  Top 0.178: v33.6,24.8 34.14,25.34 40.72,25.34 41.56,26.18 | 41.56,26.18 41.6,26.23 41.6,26.76 38.32,30.05 v38.29,33.17 | v8.89,36.18 10.13,37.43 U$2.P$4 | v22.76,20.54 v7.73,20.54 | v60.01,31.29 58.41,31.29 57.25,30.14 55.83,30.14 v54.94,29.25 | v44.54,27.74 44.54,26.85 43.29,25.6 42.14,25.6 41.6,26.14 41.56,26.18
  Bottom 0.178: 28.05,22.36 31.29,19.11 31.29,18.4 31.65,18.05 32.89,18.05 33.6,18.76 v33.6,24.8 | 28.05,22.36 27.47,22.94 27.47,25.6 IC5.43 | v38.29,33.17 38.32,37.25 38.14,37.43 U$2.P$41 | v8.89,36.18 8.89,21.69 v7.73,20.54 | v22.76,20.54 26.23,20.54 28,22.31 28.05,22.36 | v54.94,29.25 48.27,29.25 46.76,27.74 v44.54,27.74 | U$2.P$51 63.48,37.43 63.48,33.33 63.48,32.52 62.55,31.59 60.31,31.59 v60.01,31.29
VCC  (via drill 0.3)
  Top 0.305: 39.12,23.47 39.65,23.47 41.34,25.16 43.56,25.16 43.65,25.25 | 39.12,23.47 v38.05,23.47 38.14,23.56 38.14,24.45 37.69,24.89 35.56,24.89 33.07,22.4 v27.11,22.4 | 43.65,25.25 45.34,26.94 45.34,27.65 IC4.20 | v39.12,24.18 39.12,23.56 39.12,23.47 | v45.52,12.18 45.52,13.6 45.43,13.69 IC2.20 | v43.92,24.98 43.74,25.16 43.65,25.25 | v26.76,12.09 26.58,12.09 25.87,11.38 v21.51,11.38 | v3.47,26.14 3.47,24.62 IC1.20 3.56,24.45 3.56,23.82 6.13,21.25 15.11,21.25 | 15.11,21.25 18.4,24.54 18.85,24.54 IC3.20 18.94,24.45 18.94,23.91 19.82,23.02 v20.09,23.02 | v15.2,21.16 15.11,21.25
  Bottom 0.305: v38.05,23.47 37.16,23.47 36.89,23.74 36.09,23.74 R4.2 | v39.12,24.18 39.47,23.82 40.45,23.82 R6.2 | v45.52,12.18 45.52,10.13 C1.1 45.52,9.96 44.63,9.07 44.63,7.73 44.98,7.38 46.14,7.38 51.21,12.45 51.21,14.22 54.85,17.87 54.85,21.34 54.14,22.05 C2.1 54.05,22.14 54.05,23.65 | 54.05,23.65 54.85,24.45 R8.2 | 54.05,23.65 53.96,23.74 53.43,23.74 53.16,24 50.41,24 R5.2 50.32,23.91 50.23,23.82 45.16,23.82 R7.2 44.98,23.91 v43.92,24.98 | 20.45,23.02 20.45,24.27 19.91,24.8 19.91,25.6 IC5.31 | 20.45,23.02 20.45,21.78 | 20.45,21.78 20.45,19.91 19.91,19.38 19.91,16 IC5.18 19.91,15.82 19.91,13.16 21.51,11.56 v21.51,11.38 | v26.76,12.09 26.76,15.91 IC5.7 | 26.94,22.4 26.94,22.23 26.49,21.78 20.54,21.78 20.45,21.78 | 26.94,22.4 26.94,22.76 26.85,22.85 26.85,25.6 IC5.42 | 15.2,19.2 17.25,19.2 19.02,20.98 C5.1 | 15.2,19.2 13.25,19.2 C3.1 | 3.56,26.14 3.56,28.18 7.56,32.18 7.56,37.43 U$2.P$30 | 3.56,26.14 3.56,21.07 C4.1 | v3.47,26.14 3.56,26.14 | v15.2,21.16 15.2,19.29 15.2,19.2 | v20.09,23.02 20.36,23.02 20.45,23.02 | v27.11,22.4 27.03,22.4 26.94,22.4
VCCIN
  Bottom 0.305: R8.1 56.9,24.45 56.9,23.11 60.72,19.29 J1.4 59.47,20.36 52.09,12.98 52.09,11.38 47.56,6.84 43.03,6.84 36.98,0.8 5.16,0.8 3.91,2.04 3.91,5.33 2.58,6.67 2.58,7.56 JP1.1